# Altium PCB PCB1.PcbDoc (part 2 of 7)
Units mil, origin at the board's own origin, x right, y up, seen from the top; angles counter-clockwise.
Board outline 7650 x 4400 mil, 2 copper layers (Top Layer, Bottom Layer); 123 components, 190 nets, 788 pads, 165 vias.
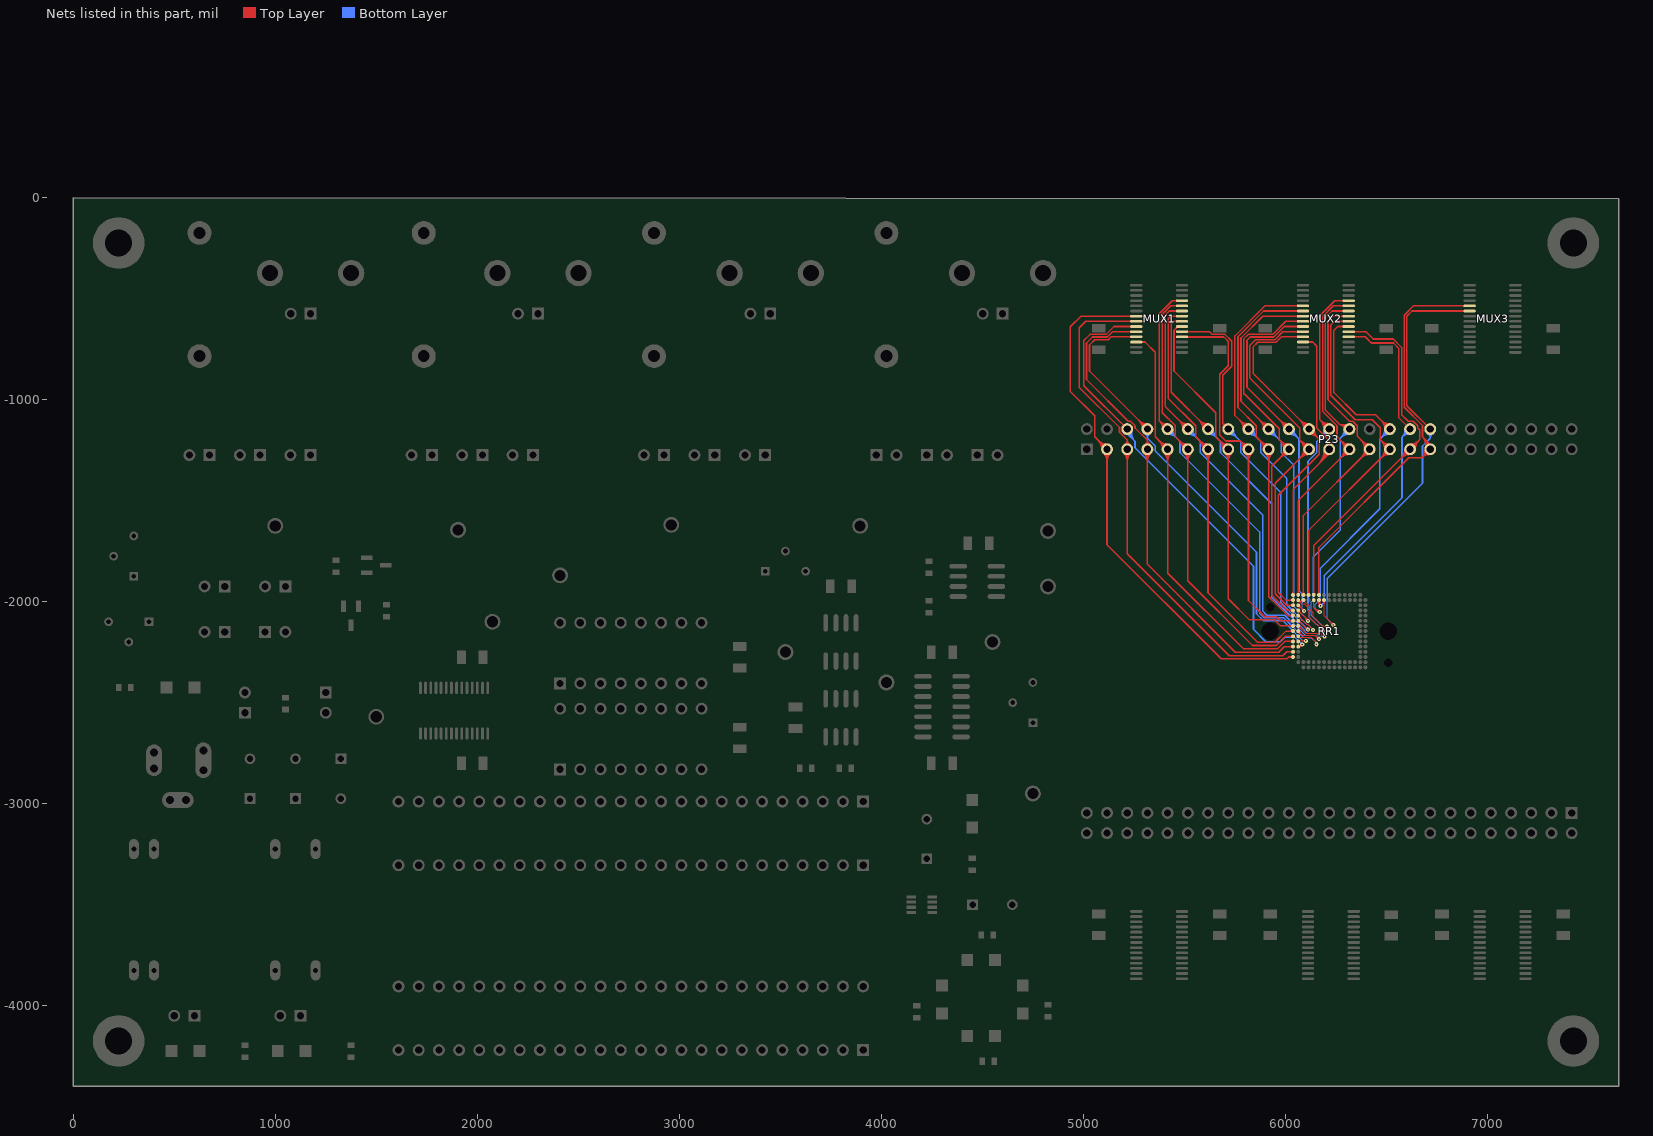
[diagram p2: the nets of this part, all layers, seen from the top]

## Via types
v1: diameter 30, hole 10, Top Layer to Bottom Layer, 118 vias
v2: diameter 20, hole 6, Top Layer to Bottom Layer, 47 vias

## Nets (pads, with @x,y where several pads share a name; then routed paths per layer and width w, separated by ;. In a path a pad name is that pad's centre, name@x,y a point inside that pad or via, vN(x,y) a via of type N, cw(c..) or ccw(c..) an arc to the next point about the centre after c; other vN are vias at no path point) (continued)
CELL2: MUX1.21 P23.3 RR1.3 | length 3032.1
  Top Layer w8: P23.3@5091.47,-1246 ccw(c5029.84,-1246) 5073.42,-1202.42 ccw(c5117,-1158.84) P23.3@5117,-1220.47 ; P23.3@5098.95,-1264.05 cw(c5055.37,-1307.63) 5117,-1307.63 cw(c5178.63,-1307.63) P23.3@5135.05,-1264.05 ; P23.3@5099.47,-1246 ccw(c5057.16,-1246) 5087.08,-1216.08 ccw(c5117,-1186.16) P23.3@5117,-1228.47 ; P23.3@5104.61,-1258.39 cw(c5074.68,-1288.32) 5117,-1288.32 cw(c5159.32,-1288.32) P23.3@5129.39,-1258.39 ; MUX1.21@5261.81,-587.2 4987.8,-587.2 4935,-640 4935,-960 5055.53,-1080.53 5055.53,-1184.53 P23.3@5117,-1246 5117,-1718.54 5682,-2283.54 6007,-2283.54 6016.59,-2273.95 RR1.3@6037.87,-2273.95 ; RR1.3@6033.73,-2278.08 ccw(c6023.76,-2288.06) 6023.76,-2273.95 ccw(c6023.76,-2259.85) RR1.3@6033.73,-2269.82 ; 5231.21,-587.2 ccw(c5231.21,-580.23) 5236.15,-585.16 cw(c5231.21,-580.23) 5231.21,-587.2 ; 5231.21,-587.2 cw(c5231.21,-594.18) 5236.15,-589.25 ccw(c5231.21,-594.18) 5231.21,-587.2
CELL3: MUX1.22 P23.5 RR1.5 | length 2874.2
  Top Layer w8: P23.5@5198.95,-1264.05 cw(c5155.37,-1307.63) 5217,-1307.63 cw(c5278.63,-1307.63) P23.5@5235.05,-1264.05 ; P23.5@5203.69,-1224.22 ccw(c5189.19,-1200.49) 5217,-1200.49 ; P23.5@5204.61,-1258.39 cw(c5174.68,-1288.32) 5217,-1288.32 cw(c5259.32,-1288.32) P23.5@5229.39,-1258.39 ; P23.5@5207.86,-1231.04 ccw(c5197.91,-1214.75) 5217,-1214.75 ccw(c5236.09,-1214.75) P23.5@5226.14,-1231.04 ; P23.5@5230.31,-1224.22 cw(c5244.81,-1200.49) 5217,-1200.49 ; MUX1.22@5261.81,-612.8 5012.2,-612.8 4980,-645 4980,-940 5178.47,-1138.47 5178.47,-1161.96 5217,-1200.49 ; RR1.5@6037.87,-2248.36 6006.18,-2248.36 5987,-2267.54 5722,-2267.54 5217,-1762.54 P23.5@5217,-1246 5217,-1200.49 ; 5231.21,-612.8 ccw(c5231.21,-605.82) 5236.15,-610.75 cw(c5231.21,-605.82) 5231.21,-612.8 ; 5231.21,-612.8 cw(c5231.21,-619.77) 5236.15,-614.84 ccw(c5231.21,-619.77) 5231.21,-612.8 ; 6023.76,-2248.36 ccw(c6023.76,-2234.26) 6033.73,-2244.23 cw(c6023.76,-2234.26) 6023.76,-2248.36 ; 6023.76,-2248.36 cw(c6023.76,-2262.47) 6033.73,-2252.49 ccw(c6023.76,-2262.47) 6023.76,-2248.36
CELL4: MUX1.23 P23.6 RR1.6 | length 2849.9
  Top Layer w5: RR1.6@6063.46,-2222.77 RR1.6@6073,-2222.77 ; RR1.6@6068.31,-2217.26 ccw(c6075.05,-2209.62) 6077.69,-2219.46 ccw(c6080.7,-2230.7) RR1.6@6070.13,-2225.84 ; RR1.6@6070.83,-2223.42 ccw(c6065.66,-2214.46) v2@6075.94,-2213.26 ; 6076.19,-2220.32 cw(c6079.65,-2226.32) v2@6081.45,-2219.63 ; RR1.6@6071.32,-2221.63 ccw(c6066.71,-2213.64) v2@6075.91,-2212.95 ; RR1.6@6071.32,-2221.63 ccw(c6066.71,-2213.64) v2@6075.91,-2212.95 ; RR1.6@6071.32,-2221.63 ccw(c6066.71,-2213.64) v2@6075.91,-2212.95 ; RR1.6@6072.81,-2220.77 cw(c6078.5,-2230.63) v2@6081.45,-2219.63 ; RR1.6@6072.81,-2220.77 cw(c6078.5,-2230.63) v2@6081.45,-2219.63 ; RR1.6@6072.81,-2220.77 cw(c6078.5,-2230.63) v2@6081.45,-2219.63 ; RR1.6@6073,-2222.77 ccw(c6065.49,-2215.26) 6075.98,-2213.57 cw(c6065.49,-2215.26) RR1.6@6073,-2222.77 ; RR1.6@6073,-2222.77 cw(c6080.52,-2230.28) 6082.2,-2219.79 ccw(c6080.52,-2230.28) RR1.6@6073,-2222.77 ; RR1.6@6073,-2222.77 v2(6083.39,-2212.39) ; v2(6083.39,-2212.39) cw(c6072.07,-2201.07) 6066.17,-2215.95 ccw(c6072.07,-2201.07) v2(6083.39,-2212.39) ; RR1.6@6064.32,-2220.59 ccw(c6069.01,-2208.77) 6078.01,-2217.77 cw(c6069.01,-2208.77) RR1.6@6064.32,-2220.59
  Top Layer w8: P23.6@5217,-1146 5002.5,-931.5 5002.5,-707.5 5032.5,-677.5 5112.19,-677.5 5151.31,-638.39 MUX1.23@5261.81,-638.39 ; 5231.21,-638.39 ccw(c5231.21,-631.41) 5236.15,-636.34 cw(c5231.21,-631.41) 5231.21,-638.39 ; 5231.21,-638.39 cw(c5231.21,-645.36) 5236.15,-640.43 ccw(c5231.21,-645.36) 5231.21,-638.39
  Bottom Layer w5: 6037,-2176 6047,-2176 v2(6083.39,-2212.39) ; 6070.58,-2199.58 ccw(c6083.39,-2186.78) 6083.39,-2204.89 cw(c6083.39,-2186.78) 6070.58,-2199.58 ; 6070.58,-2199.58 cw(c6057.78,-2212.39) 6075.89,-2212.39 ccw(c6057.78,-2212.39) 6070.58,-2199.58
  Bottom Layer w8: P23.6@5217,-1146 5217,-1168.94 5255.53,-1207.47 ; P23.6@5218.47,-1146.42 ccw(c5249.98,-1155.53) 5226.79,-1178.73 ; P23.6@5226.15,-1148.65 ccw(c5264.85,-1159.83) 5236.37,-1188.31 ; P23.6@5233.84,-1150.87 ccw(c5279.71,-1164.13) 5245.95,-1197.89 ; P23.6@5241.52,-1153.09 ccw(c5294.57,-1168.42) 5255.53,-1207.47 ; 6037,-2176 5997,-2176 5974.69,-2198.31 5903.01,-2198.31 5842,-2137.3 5842,-1825.49 5255.53,-1239.01 5255.53,-1207.47
CELL5: MUX1.24 P23.7 RR1.7 | length 2726.5
  Top Layer w8: MUX1.24@5261.81,-663.98 5144.1,-663.98 5117.58,-690.5 5044.99,-690.5 5015.5,-720 5015.5,-900.5 5222.47,-1107.47 5232.96,-1107.47 5255.53,-1130.04 5255.53,-1140.53 5317,-1202 ; P23.7@5298.95,-1264.05 cw(c5255.37,-1307.63) 5317,-1307.63 cw(c5378.63,-1307.63) P23.7@5335.05,-1264.05 ; P23.7@5304.33,-1223.84 ccw(c5291.85,-1202) 5317,-1202 ; P23.7@5304.61,-1258.39 cw(c5274.68,-1288.32) 5317,-1288.32 cw(c5359.32,-1288.32) P23.7@5329.39,-1258.39 ; P23.7@5308.3,-1230.78 ccw(c5299.73,-1215.79) 5317,-1215.79 ccw(c5334.27,-1215.79) P23.7@5325.7,-1230.78 ; P23.7@5329.67,-1223.84 cw(c5342.15,-1202) 5317,-1202 ; RR1.7@6037.87,-2222.77 5994,-2222.77 5966.81,-2249.97 5752,-2249.97 5317,-1814.97 P23.7@5317,-1246 5317,-1202 ; 5231.21,-663.98 ccw(c5231.21,-657) 5236.15,-661.93 cw(c5231.21,-657) 5231.21,-663.98 ; 5231.21,-663.98 cw(c5231.21,-670.95) 5236.15,-666.02 ccw(c5231.21,-670.95) 5231.21,-663.98 ; 6023.76,-2222.77 ccw(c6023.76,-2208.67) 6033.73,-2218.64 cw(c6023.76,-2208.67) 6023.76,-2222.77 ; 6023.76,-2222.77 cw(c6023.76,-2236.88) 6033.73,-2226.9 ccw(c6023.76,-2236.88) 6023.76,-2222.77
CELL6: MUX1.25 P23.8 RR1.8 | length 2660.3
  Top Layer w5: RR1.8@6063.46,-2197.18 6066.64,-2194 v2(6101,-2194) ; 6082.89,-2194 ccw(c6082.89,-2175.89) 6095.7,-2188.7 cw(c6082.89,-2175.89) 6082.89,-2194 ; 6082.89,-2194 cw(c6082.89,-2212.11) 6095.7,-2199.3 ccw(c6082.89,-2212.11) 6082.89,-2194
  Top Layer w8: MUX1.25@5261.81,-689.57 5136.9,-689.57 5122.96,-703.5 5056.5,-703.5 5030,-730 5030,-859 P23.8@5317,-1146 P23.8@5335,-1128 ; P23.8@5291.47,-1146 ccw(c5229.84,-1146) 5273.42,-1102.42 ccw(c5317,-1058.84) P23.8@5317,-1120.47 ; P23.8@5299.47,-1146 ccw(c5257.16,-1146) 5287.08,-1116.08 ccw(c5317,-1086.16) P23.8@5317,-1128.47 ; 5231.21,-689.57 ccw(c5231.21,-682.59) 5236.15,-687.52 cw(c5231.21,-682.59) 5231.21,-689.57 ; 5231.21,-689.57 cw(c5231.21,-696.54) 5236.15,-691.61 ccw(c5231.21,-696.54) 5231.21,-689.57
  Bottom Layer w5: 6047,-2154.03 6086.97,-2194 ; v2(6101,-2194) 6086.97,-2194 ; 6086.97,-2194 ccw(c6086.97,-2184.62) 6094.76,-2189.83 cw(c6086.97,-2184.62) 6086.97,-2194 ; 6086.97,-2194 cw(c6086.97,-2203.38) 6094.76,-2198.17 ccw(c6086.97,-2203.38) 6086.97,-2194
  Bottom Layer w8: P23.8@5303.69,-1167.78 cw(c5289.19,-1191.51) 5317,-1191.51 ; P23.8@5307.86,-1160.96 cw(c5297.91,-1177.25) 5317,-1177.25 cw(c5336.09,-1177.25) P23.8@5326.14,-1160.96 ; P23.8@5317,-1146 5317,-1191.51 ; P23.8@5330.31,-1167.78 ccw(c5344.81,-1191.51) 5317,-1191.51 ; 6047,-2154.03 5986.66,-2093.69 5889.69,-2093.69 5857,-2061 5857,-1756 5355.53,-1254.53 5355.53,-1230.04 5317,-1191.51
CELL7: MUX1.26 P23.9 RR1.9 | length 2417.7
  Top Layer w8: MUX1.26@5261.81,-715.16 5305.16,-715.16 5355.53,-765.53 5355.53,-1184.53 P23.9@5417,-1246 5417,-1858.97 5792,-2233.97 5807,-2233.97 5807.66,-2233.31 5960.84,-2233.31 5996.97,-2197.18 RR1.9@6037.87,-2197.18 ; P23.9@5391.47,-1246 ccw(c5329.84,-1246) 5373.42,-1202.42 ccw(c5417,-1158.84) P23.9@5417,-1220.47 ; P23.9@5398.95,-1264.05 cw(c5355.37,-1307.63) 5417,-1307.63 cw(c5478.63,-1307.63) P23.9@5435.05,-1264.05 ; P23.9@5399.47,-1246 ccw(c5357.16,-1246) 5387.08,-1216.08 ccw(c5417,-1186.16) P23.9@5417,-1228.47 ; P23.9@5404.61,-1258.39 cw(c5374.68,-1288.32) 5417,-1288.32 cw(c5459.32,-1288.32) P23.9@5429.39,-1258.39 ; 5292.41,-715.16 ccw(c5292.41,-722.13) 5287.48,-717.2 cw(c5292.41,-722.13) 5292.41,-715.16 ; 5292.41,-715.16 cw(c5292.41,-708.18) 5287.48,-713.11 ccw(c5292.41,-708.18) 5292.41,-715.16 ; 6023.76,-2197.18 ccw(c6023.76,-2183.08) 6033.73,-2193.05 cw(c6023.76,-2183.08) 6023.76,-2197.18 ; 6023.76,-2197.18 cw(c6023.76,-2211.29) 6033.73,-2201.31 ccw(c6023.76,-2211.29) 6023.76,-2197.18
CELL8: MUX1.11 P23.10 RR1.10 | length 2628.5
  Top Layer w5: RR1.10@6063.46,-2171.59 6068.37,-2176.5 6108.25,-2176.5 6109.25,-2177.5 6128.25,-2177.5 6153,-2202.25 v2(6153,-2211)
  Top Layer w8: P23.10@5391.48,-1145.32 ccw(c5335.17,-1143.83) 5375,-1104 ; P23.10@5399.48,-1145.54 ccw(c5360.81,-1144.51) 5388.16,-1117.16 ccw(c5415.51,-1089.81) P23.10@5416.54,-1128.48 ; P23.10@5416.32,-1120.48 cw(c5414.83,-1064.17) 5375,-1104 ; P23.10@5417,-1146 5375,-1104 ; MUX1.11@5488.19,-510.43 5439.57,-510.43 5375,-575 5375,-1104 ; 5457.59,-510.43 ccw(c5457.59,-503.46) 5462.52,-508.39 cw(c5457.59,-503.46) 5457.59,-510.43 ; 5457.59,-510.43 cw(c5457.59,-517.41) 5462.52,-512.48 ccw(c5457.59,-517.41) 5457.59,-510.43
  Bottom Layer w5: 6026.41,-2115.06 6087.85,-2176.5 6108.25,-2176.5 6109.75,-2178 6128.75,-2178 6153,-2202.25 v2(6153,-2211)
  Bottom Layer w8: P23.10@5417,-1171.53 cw(c5417,-1233.16) 5460.58,-1189.58 cw(c5504.16,-1146) P23.10@5442.53,-1146 ; P23.10@5417,-1163.53 cw(c5417,-1205.84) 5446.92,-1175.92 cw(c5476.84,-1146) P23.10@5434.53,-1146 ; P23.10@5417,-1146 5478.47,-1207.47 5478.47,-1261.96 5872,-1655.49 5872,-2057.62 5895.08,-2080.69 5992.04,-2080.69 6026.41,-2115.06
CELL9: MUX1.10 P23.11 RR1.11 | length 2552.4
  Top Layer w8: MUX1.10@5488.19,-536.02 5432.36,-536.02 5390,-578.38 5390,-1064.51 5455.53,-1130.04 5455.53,-1184.53 P23.11@5517,-1246 5517,-1897.31 5837,-2217.31 5954.21,-2217.31 5999.93,-2171.59 RR1.11@6037.87,-2171.59 ; P23.11@5491.47,-1246 ccw(c5429.84,-1246) 5473.42,-1202.42 ccw(c5517,-1158.84) P23.11@5517,-1220.47 ; P23.11@5498.95,-1264.05 cw(c5455.37,-1307.63) 5517,-1307.63 cw(c5578.63,-1307.63) P23.11@5535.05,-1264.05 ; P23.11@5499.47,-1246 ccw(c5457.16,-1246) 5487.08,-1216.08 ccw(c5517,-1186.16) P23.11@5517,-1228.47 ; P23.11@5504.61,-1258.39 cw(c5474.68,-1288.32) 5517,-1288.32 cw(c5559.32,-1288.32) P23.11@5529.39,-1258.39 ; 5457.59,-536.02 ccw(c5457.59,-529.05) 5462.52,-533.98 cw(c5457.59,-529.05) 5457.59,-536.02 ; 5457.59,-536.02 cw(c5457.59,-543) 5462.52,-538.07 ccw(c5457.59,-543) 5457.59,-536.02 ; 6023.76,-2171.59 ccw(c6023.76,-2157.49) 6033.73,-2167.46 cw(c6023.76,-2157.49) 6023.76,-2171.59 ; 6023.76,-2171.59 cw(c6023.76,-2185.7) 6033.73,-2175.72 ccw(c6023.76,-2185.7) 6023.76,-2171.59
CELL10: MUX1.9 P23.12 RR1.12 | length 2720.1
  Top Layer w5: RR1.12@6060.85,-2146.53 ccw(c6071.32,-2144.39) 6068.55,-2154.71 ; RR1.12@6063.46,-2146 6083.96,-2166.5 6112.39,-2166.5 6113.39,-2167.5 6147.5,-2167.5 v2(6166,-2186) ; RR1.12@6063.99,-2143.4 cw(c6061.85,-2153.86) 6072.16,-2151.1 ; 6157.02,-2180.46 ccw(c6167.72,-2177.59) v2@6165.5,-2188.45 ; 6160.46,-2177.02 cw(c6157.59,-2187.72) v2@6168.45,-2185.5 ; 6075.99,-2158.53 ccw(c6063.46,-2171.07) 6063.46,-2153.34 cw(c6063.46,-2171.07) 6075.99,-2158.53 ; 6075.99,-2158.53 cw(c6088.53,-2146) 6070.8,-2146 ccw(c6088.53,-2146) 6075.99,-2158.53 ; 6153.2,-2173.2 ccw(c6166,-2160.39) 6166,-2178.5 cw(c6166,-2160.39) 6153.2,-2173.2 ; 6153.2,-2173.2 cw(c6140.39,-2186) 6158.5,-2186 ccw(c6140.39,-2186) 6153.2,-2173.2
  Top Layer w8: MUX1.9@5488.19,-561.61 5425.16,-561.61 5405,-581.77 5405,-1034 P23.12@5517,-1146 ; P23.12@5491.47,-1146 ccw(c5429.84,-1146) 5473.42,-1102.42 ccw(c5517,-1058.84) P23.12@5517,-1120.47 ; P23.12@5499.47,-1146 ccw(c5457.16,-1146) 5487.08,-1116.08 ccw(c5517,-1086.16) P23.12@5517,-1128.47 ; 5457.59,-561.61 ccw(c5457.59,-554.64) 5462.52,-559.57 cw(c5457.59,-554.64) 5457.59,-561.61 ; 5457.59,-561.61 cw(c5457.59,-568.59) 5462.52,-563.66 ccw(c5457.59,-568.59) 5457.59,-561.61
  Bottom Layer w5: 6032.86,-2101 6098.36,-2166.5 6112.39,-2166.5 6113.39,-2167.5 6147.5,-2167.5 v2(6166,-2186)
  Bottom Layer w8: P23.12@5517,-1171.53 cw(c5517,-1233.16) 5560.58,-1189.58 cw(c5604.16,-1146) P23.12@5542.53,-1146 ; P23.12@5517,-1163.53 cw(c5517,-1205.84) 5546.92,-1175.92 cw(c5576.84,-1146) P23.12@5534.53,-1146 ; P23.12@5517,-1146 5578.47,-1207.47 5578.47,-1261.96 5887.51,-1571 5887.51,-2046.51 5908.26,-2067.26 5997,-2067.26 6031.8,-2102.06
CELL11: MUX1.8 P23.13 RR1.13 | length 2449.4
  Top Layer w8: MUX1.8@5488.19,-587.2 5432.8,-587.2 5420,-600 5420,-994.51 5555.53,-1130.04 5555.53,-1184.53 P23.13@5617,-1246 5617,-1956.31 5862,-2201.31 5947.59,-2201.31 6002.89,-2146 RR1.13@6037.87,-2146 ; P23.13@5591.47,-1246 ccw(c5529.84,-1246) 5573.42,-1202.42 ccw(c5617,-1158.84) P23.13@5617,-1220.47 ; P23.13@5598.95,-1264.05 cw(c5555.37,-1307.63) 5617,-1307.63 cw(c5678.63,-1307.63) P23.13@5635.05,-1264.05 ; P23.13@5599.47,-1246 ccw(c5557.16,-1246) 5587.08,-1216.08 ccw(c5617,-1186.16) P23.13@5617,-1228.47 ; P23.13@5604.61,-1258.39 cw(c5574.68,-1288.32) 5617,-1288.32 cw(c5659.32,-1288.32) P23.13@5629.39,-1258.39 ; 5457.59,-587.2 ccw(c5457.59,-580.23) 5462.52,-585.16 cw(c5457.59,-580.23) 5457.59,-587.2 ; 5457.59,-587.2 cw(c5457.59,-594.18) 5462.52,-589.25 ccw(c5457.59,-594.18) 5457.59,-587.2 ; 6023.76,-2146 ccw(c6023.76,-2131.9) 6033.73,-2141.87 cw(c6023.76,-2131.9) 6023.76,-2146 ; 6023.76,-2146 cw(c6023.76,-2160.1) 6033.73,-2150.13 ccw(c6023.76,-2160.1) 6023.76,-2146
CELL12: MUX1.7 P23.14 RR1.14 | length 2542.6
  Top Layer w5: RR1.14@6060.85,-2120.94 ccw(c6071.32,-2118.8) 6068.55,-2129.12 ; RR1.14@6063.46,-2120.41 6099.55,-2156.5 6116.53,-2156.5 6117.53,-2157.5 6173.75,-2157.5 6189.25,-2173 v2(6193,-2173) ; RR1.14@6063.99,-2117.81 cw(c6061.85,-2128.27) 6072.16,-2125.51 ; 6075.99,-2132.94 ccw(c6063.46,-2145.48) 6063.46,-2127.75 cw(c6063.46,-2145.48) 6075.99,-2132.94 ; 6075.99,-2132.94 cw(c6088.53,-2120.41) 6070.8,-2120.41 ccw(c6088.53,-2120.41) 6075.99,-2132.94
  Top Layer w8: MUX1.7@5488.19,-612.8 5445.2,-612.8 5435,-623 5435,-964 P23.14@5617,-1146 ; P23.14@5591.47,-1146 ccw(c5529.84,-1146) 5573.42,-1102.42 ccw(c5617,-1058.84) P23.14@5617,-1120.47 ; P23.14@5599.47,-1146 ccw(c5557.16,-1146) 5587.08,-1116.08 ccw(c5617,-1086.16) P23.14@5617,-1128.47 ; 5457.59,-612.8 ccw(c5457.59,-605.82) 5462.52,-610.75 cw(c5457.59,-605.82) 5457.59,-612.8 ; 5457.59,-612.8 cw(c5457.59,-619.77) 5462.52,-614.84 ccw(c5457.59,-619.77) 5457.59,-612.8
  Bottom Layer w5: 6038.06,-2085.45 6094.5,-2141.88 6094.5,-2146.25 6104.75,-2156.5 6116.53,-2156.5 6117.53,-2157.5 6151.64,-2157.5 6162.64,-2168.5 6188.5,-2168.5 v2(6193,-2173)
  Bottom Layer w8: P23.14@5617,-1171.53 cw(c5617,-1233.16) 5660.58,-1189.58 cw(c5704.16,-1146) P23.14@5642.53,-1146 ; P23.14@5617,-1163.53 cw(c5617,-1205.84) 5646.92,-1175.92 cw(c5676.84,-1146) P23.14@5634.53,-1146 ; P23.14@5617,-1146 5678.47,-1207.47 5678.47,-1261.96 5932,-1515.49 5932,-1979.38 6038.06,-2085.45
CELL13: MUX1.6 P23.15 RR1.15 | length 2257.1
  Top Layer w8: MUX1.6@5488.19,-638.39 5467.69,-638.39 5448.68,-657.39 5448.68,-858.68 5655,-1065 5655,-1128.99 5655.53,-1129.51 5655.53,-1184.53 P23.15@5717,-1246 5717,-1985.69 5822,-2090.69 5947.59,-2090.69 5977.3,-2120.41 RR1.15@6037.87,-2120.41 ; P23.15@5691.47,-1246 ccw(c5629.84,-1246) 5673.42,-1202.42 ccw(c5717,-1158.84) P23.15@5717,-1220.47 ; P23.15@5698.95,-1264.05 cw(c5655.37,-1307.63) 5717,-1307.63 cw(c5778.63,-1307.63) P23.15@5735.05,-1264.05 ; P23.15@5699.47,-1246 ccw(c5657.16,-1246) 5687.08,-1216.08 ccw(c5717,-1186.16) P23.15@5717,-1228.47 ; P23.15@5704.61,-1258.39 cw(c5674.68,-1288.32) 5717,-1288.32 cw(c5759.32,-1288.32) P23.15@5729.39,-1258.39 ; 6023.76,-2120.41 ccw(c6023.76,-2106.3) 6033.73,-2116.28 cw(c6023.76,-2106.3) 6023.76,-2120.41 ; 6023.76,-2120.41 cw(c6023.76,-2134.51) 6033.73,-2124.54 ccw(c6023.76,-2134.51) 6023.76,-2120.41 ; 5457.43,-648.64 ccw(c5447.17,-638.39) 5461.68,-638.39 cw(c5447.17,-638.39) 5457.43,-648.64
CELL14: MUX1.5 P23.16 RR1.16 | length 2410.2
  Top Layer w5: RR1.16@6060.85,-2095.35 ccw(c6071.32,-2093.21) 6068.55,-2103.53 ; RR1.16@6063.46,-2094.82 6107.64,-2139 v2(6112,-2139) ; RR1.16@6063.99,-2092.22 cw(c6061.85,-2102.68) 6072.16,-2099.92 ; 6104.76,-2129.56 cw(c6101.08,-2143.32) v2@6114.32,-2138.08 ; 6075.99,-2107.35 ccw(c6063.46,-2119.89) 6063.46,-2102.16 cw(c6063.46,-2119.89) 6075.99,-2107.35 ; 6075.99,-2107.35 cw(c6088.53,-2094.82) 6070.8,-2094.82 ccw(c6088.53,-2094.82) 6075.99,-2107.35 ; 6091.75,-2123.11 ccw(c6112,-2102.86) 6112,-2131.5 cw(c6112,-2102.86) 6091.75,-2123.11 ; 6100.29,-2131.65 ccw(c6112,-2119.93) 6112,-2136.5 cw(c6112,-2119.93) 6100.29,-2131.65 ; 6102.28,-2133.64 cw(c6096.92,-2139) 6104.5,-2139 ccw(c6096.92,-2139) 6102.28,-2133.64
  Top Layer w8: MUX1.5@5488.19,-663.98 5624.28,-663.98 5637.81,-677.5 5700.89,-677.5 5735,-711.62 5735,-835 5690,-880 5690,-1119 ; P23.16@5693.42,-1136.22 ccw(c5678.83,-1130.17) 5690,-1119 ; P23.16@5707.22,-1122.42 cw(c5701.17,-1107.83) 5690,-1119 ; P23.16@5717,-1146 5690,-1119 ; 5518.79,-663.98 ccw(c5518.79,-670.95) 5513.85,-666.02 cw(c5518.79,-670.95) 5518.79,-663.98 ; 5518.79,-663.98 cw(c5518.79,-657) 5513.85,-661.93 ccw(c5518.79,-657) 5518.79,-663.98
  Bottom Layer w5: 6042,-2071 6044,-2071 v2(6112,-2139) ; 6099.2,-2126.2 ccw(c6112,-2113.39) 6112,-2131.5 cw(c6112,-2113.39) 6099.2,-2126.2 ; 6099.2,-2126.2 cw(c6086.39,-2139) 6104.5,-2139 ccw(c6086.39,-2139) 6099.2,-2126.2
  Bottom Layer w8: P23.16@5717,-1171.53 cw(c5717,-1233.16) 5760.58,-1189.58 cw(c5804.16,-1146) P23.16@5742.53,-1146 ; P23.16@5717,-1163.53 cw(c5717,-1205.84) 5746.92,-1175.92 cw(c5776.84,-1146) P23.16@5734.53,-1146 ; P23.16@5717,-1146 5778.47,-1207.47 5778.47,-1261.96 5977,-1460.49 5977,-2006 6042,-2071
CELL15: MUX1.4 P23.17 RR1.17 | length 2273.4
  Top Layer w8: MUX1.4@5488.19,-689.57 5489.13,-690.5 5695.5,-690.5 5717.46,-712.46 5717.46,-832.54 5675,-875 5675,-1175 5705,-1205 5776,-1205 ; P23.17@5791.5,-1244.87 ccw(c5738.47,-1242.54) 5776,-1205 ; P23.17@5798.95,-1264.05 cw(c5755.37,-1307.63) 5817,-1307.63 cw(c5878.63,-1307.63) P23.17@5835.05,-1264.05 ; P23.17@5799.49,-1245.23 ccw(c5763.08,-1243.62) 5788.85,-1217.85 ccw(c5814.62,-1192.08) P23.17@5816.23,-1228.49 ; P23.17@5804.61,-1258.39 cw(c5774.68,-1288.32) 5817,-1288.32 cw(c5859.32,-1288.32) P23.17@5829.39,-1258.39 ; P23.17@5815.87,-1220.5 cw(c5813.54,-1167.47) 5776,-1205 ; RR1.17@6037.87,-2094.82 5974.34,-2094.82 5954.21,-2074.69 5897,-2074.69 5817,-1994.69 P23.17@5817,-1246 5776,-1205 ; 6023.76,-2094.82 ccw(c6023.76,-2080.71) 6033.73,-2090.69 cw(c6023.76,-2080.71) 6023.76,-2094.82 ; 6023.76,-2094.82 cw(c6023.76,-2108.92) 6033.73,-2098.95 ccw(c6023.76,-2108.92) 6023.76,-2094.82 ; MUX1.4@5513.85,-687.52 ccw(c5521.05,-680.33) 5521.05,-690.5 cw(c5521.05,-680.33) MUX1.4@5513.85,-687.52
CELL16: MUX2.19 P23.18 RR1.18 | length 2538.6
  Top Layer w5: RR1.18@6063.46,-2069.23 6063.46,-2070.29 6080.8,-2087.64 6080.8,-2088.94 6104.36,-2112.5 6110.25,-2112.5 6137,-2139.25 v2(6137,-2140) ; RR1.18@6064.12,-2066.65 cw(c6061.3,-2077.66) 6072.27,-2074.72 ; RR1.18@6063.46,-2076.57 cw(c6063.46,-2091.73) 6074.17,-2081.01 ccw(c6063.46,-2091.73) RR1.18@6063.46,-2076.57 ; RR1.18@6070.8,-2069.23 ccw(c6091.1,-2069.23) 6076.74,-2083.58 cw(c6091.1,-2069.23) RR1.18@6070.8,-2069.23
  Top Layer w8: P23.18@5791.47,-1146 ccw(c5729.84,-1146) 5773.42,-1102.42 ccw(c5817,-1058.84) P23.18@5817,-1120.47 ; P23.18@5799.47,-1146 ccw(c5757.16,-1146) 5787.08,-1116.08 ccw(c5817,-1086.16) P23.18@5817,-1128.47 ; P23.18@5817,-1146 5750,-1079 5750,-685 5898.98,-536.02 MUX2.19@6086.81,-536.02 ; 6056.21,-536.02 ccw(c6056.21,-529.05) 6061.15,-533.98 cw(c6056.21,-529.05) 6056.21,-536.02 ; 6056.21,-536.02 cw(c6056.21,-543) 6061.15,-538.07 ccw(c6056.21,-543) 6056.21,-536.02
  Bottom Layer w5: 6082,-2091 6083.25,-2091 6104.75,-2112.5 6110.25,-2112.5 6137,-2139.25 v2(6137,-2140)
  Bottom Layer w8: P23.18@5817,-1171.53 cw(c5817,-1233.16) 5860.58,-1189.58 cw(c5904.16,-1146) P23.18@5842.53,-1146 ; P23.18@5817,-1163.53 cw(c5817,-1205.84) 5846.92,-1175.92 cw(c5876.84,-1146) P23.18@5834.53,-1146 ; P23.18@5817,-1146 5878.47,-1207.47 5878.47,-1261.96 6007,-1390.49 6007,-2016 6082,-2091
CELL17: MUX2.20 P23.19 RR1.19 | length 2255
  Top Layer w8: P23.19@5891.47,-1246 ccw(c5829.84,-1246) 5873.42,-1202.42 ccw(c5917,-1158.84) P23.19@5917,-1220.47 ; P23.19@5898.95,-1264.05 cw(c5855.37,-1307.63) 5917,-1307.63 cw(c5978.63,-1307.63) P23.19@5935.05,-1264.05 ; P23.19@5899.47,-1246 ccw(c5857.16,-1246) 5887.08,-1216.08 ccw(c5917,-1186.16) P23.19@5917,-1228.47 ; P23.19@5904.61,-1258.39 cw(c5874.68,-1288.32) 5917,-1288.32 cw(c5959.32,-1288.32) P23.19@5929.39,-1258.39 ; RR1.19@6033.73,-2073.36 ccw(c6023.76,-2083.33) 6023.76,-2069.23 ccw(c6023.76,-2055.12) RR1.19@6033.73,-2065.1 ; RR1.19@6037.87,-2069.23 6011.94,-2069.23 5938.13,-1995.42 5936.42,-1995.42 5917,-1976 P23.19@5917,-1246 5855.53,-1184.53 5855.53,-1130.04 5765,-1039.51 5765,-688.38 5891.77,-561.61 MUX2.20@6086.81,-561.61 ; 6056.21,-561.61 ccw(c6056.21,-554.64) 6061.15,-559.57 cw(c6056.21,-554.64) 6056.21,-561.61 ; 6056.21,-561.61 cw(c6056.21,-568.59) 6061.15,-563.66 ccw(c6056.21,-568.59) 6056.21,-561.61
CELL18: MUX2.21 P23.20 RR1.20 | length 2547.9
  Top Layer w5: RR1.20@6063.46,-2043.64 6063.46,-2044.7 6112,-2093.25 v2(6112,-2095) ; RR1.20@6064.12,-2041.06 cw(c6061.3,-2052.07) 6072.27,-2049.13 ; 6102.83,-2088.78 ccw(c6114.69,-2085.6) v2@6111.31,-2097.4 ; 6107.14,-2086.2 cw(c6104.55,-2095.85) v2@6114.48,-2094.72 ; RR1.20@6063.46,-2050.98 cw(c6063.46,-2066.14) 6074.17,-2055.42 ccw(c6063.46,-2066.14) RR1.20@6063.46,-2050.98 ; RR1.20@6070.8,-2043.64 ccw(c6091.1,-2043.64) 6076.74,-2057.99 cw(c6091.1,-2043.64) RR1.20@6070.8,-2043.64 ; 6097.96,-2079.2 cw(c6082.16,-2095) 6104.5,-2095 ccw(c6082.16,-2095) 6097.96,-2079.2 ; 6102.19,-2083.44 ccw(c6112,-2073.63) 6112,-2087.5 cw(c6112,-2073.63) 6102.19,-2083.44
  Top Layer w8: P23.20@5891.47,-1146 ccw(c5829.84,-1146) 5873.42,-1102.42 ccw(c5917,-1058.84) P23.20@5917,-1120.47 ; P23.20@5899.47,-1146 ccw(c5857.16,-1146) 5887.08,-1116.08 ccw(c5917,-1086.16) P23.20@5917,-1128.47 ; P23.20@5917,-1146 5780,-1009 5780,-695 5887.8,-587.2 MUX2.21@6086.81,-587.2 ; 6056.21,-587.2 ccw(c6056.21,-580.23) 6061.15,-585.16 cw(c6056.21,-580.23) 6056.21,-587.2 ; 6056.21,-587.2 cw(c6056.21,-594.18) 6061.15,-589.25 ccw(c6056.21,-594.18) 6056.21,-587.2
  Bottom Layer w5: 6042,-1981 6042,-2022.22 6112,-2092.22 v2(6112,-2095) ; 6102.73,-2088.38 ccw(c6115.31,-2085.01) v2@6111.21,-2097.37 ; 6097.23,-2077.44 cw(c6079.67,-2095) 6104.5,-2095 ccw(c6079.67,-2095) 6097.23,-2077.44 ; 6103.95,-2084.17 ccw(c6112,-2076.11) 6112,-2087.5 cw(c6112,-2076.11) 6103.95,-2084.17 ; 6105.76,-2085.98 cw(c6096.74,-2095) 6109.5,-2095 ccw(c6096.74,-2095) 6105.76,-2085.98
  Bottom Layer w8: P23.20@5917,-1171.53 cw(c5917,-1233.16) 5960.58,-1189.58 cw(c6004.16,-1146) P23.20@5942.53,-1146 ; P23.20@5917,-1163.53 cw(c5917,-1205.84) 5946.92,-1175.92 cw(c5976.84,-1146) P23.20@5934.53,-1146 ; P23.20@5917,-1146 5978.47,-1207.47 5978.47,-1261.96 6042,-1325.49 6042,-1981
CELL19: MUX2.22 P23.21 RR1.21 | length 2257.3
  Top Layer w8: P23.21@6017,-1271.53 ccw(c6017,-1333.16) 5973.42,-1289.58 ccw(c5929.84,-1246) 5991.47,-1246 ccw(c5929.84,-1246) 5973.42,-1202.42 ccw(c6017,-1158.84) P23.21@6017,-1220.47 ; P23.21@6017,-1263.53 ccw(c6017,-1305.84) 5987.08,-1275.92 ccw(c5957.16,-1246) 5999.47,-1246 ccw(c5957.16,-1246) 5987.08,-1216.08 ccw(c6017,-1186.16) P23.21@6017,-1228.47 ; RR1.21@6037.87,-2043.64 6008.98,-2043.64 5933,-1967.66 5933,-1330 P23.21@6017,-1246 5970,-1199 5970,-1144.51 5798.49,-973 5793,-973 5793,-700.38 5815.88,-677.5 5937.19,-677.5 6001.9,-612.8 MUX2.22@6086.81,-612.8 ; 6023.76,-2043.64 ccw(c6023.76,-2029.53) 6033.73,-2039.51 cw(c6023.76,-2029.53) 6023.76,-2043.64 ; 6023.76,-2043.64 cw(c6023.76,-2057.74) 6033.73,-2047.77 ccw(c6023.76,-2057.74) 6023.76,-2043.64 ; 6056.21,-612.8 ccw(c6056.21,-605.82) 6061.15,-610.75 cw(c6056.21,-605.82) 6056.21,-612.8 ; 6056.21,-612.8 cw(c6056.21,-619.77) 6061.15,-614.84 ccw(c6056.21,-619.77) 6056.21,-612.8
CELL20: MUX2.23 P23.22 RR1.22 | length 2313.8
  Top Layer w5: RR1.22@6060.87,-2018.65 ccw(c6071.63,-2016.14) 6068.77,-2026.81 ; RR1.22@6063.46,-2018.05 6064.05,-2018.05 v2(6093,-2047) ; RR1.22@6063.91,-2015.43 cw(c6062.14,-2025.6) 6072.11,-2022.92 ; 6084.02,-2041.46 ccw(c6094.72,-2038.59) v2@6092.5,-2049.45 ; 6087.46,-2038.02 cw(c6084.59,-2048.72) v2@6095.45,-2046.5 ; 6080.2,-2034.2 ccw(c6093,-2021.39) 6093,-2039.5 cw(c6093,-2021.39) 6080.2,-2034.2 ; 6080.2,-2034.2 cw(c6067.39,-2047) 6085.5,-2047 ccw(c6067.39,-2047) 6080.2,-2034.2 ; RR1.22@6063.46,-2025.39 cw(c6063.46,-2044.54) 6077,-2031 ccw(c6063.46,-2044.54) RR1.22@6063.46,-2025.39 ; RR1.22@6070.8,-2018.05 ccw(c6087.1,-2018.05) 6075.57,-2029.57 cw(c6087.1,-2018.05) RR1.22@6070.8,-2018.05
  Top Layer w8: P23.22@5991.47,-1146 ccw(c5929.84,-1146) 5973.42,-1102.42 ccw(c6017,-1058.84) P23.22@6017,-1120.47 ; P23.22@5999.47,-1146 ccw(c5957.16,-1146) 5987.08,-1116.08 ccw(c6017,-1086.16) P23.22@6017,-1128.47 ; P23.22@6017,-1146 5810,-939 5810,-706 5825.5,-690.5 5942.58,-690.5 5994.7,-638.39 MUX2.23@6086.81,-638.39 ; 6056.21,-638.39 ccw(c6056.21,-631.41) 6061.15,-636.34 cw(c6056.21,-631.41) 6056.21,-638.39 ; 6056.21,-638.39 cw(c6056.21,-645.36) 6061.15,-640.43 ccw(c6056.21,-645.36) 6056.21,-638.39
  Bottom Layer w5: 6083.5,-2006 6083.5,-2037.5 v2(6093,-2047)
  Bottom Layer w8: P23.22@6017,-1171.53 cw(c6017,-1233.16) 6060.58,-1189.58 cw(c6104.16,-1146) P23.22@6042.53,-1146 ; P23.22@6017,-1163.53 cw(c6017,-1205.84) 6046.92,-1175.92 cw(c6076.84,-1146) P23.22@6034.53,-1146 ; P23.22@6017,-1146 6067,-1196 6067,-1946 6083.5,-1962.5 6083.5,-2006
CELL21: MUX2.24 P23.23 RR1.23 | length 2217.6
  Top Layer w8: RR1.23@6037.87,-2018.05 6006.01,-2018.05 5949,-1961.03 5949,-1414 P23.23@6117,-1246 6070,-1199 6070,-1140 5823,-893 5823,-732 5851.5,-703.5 5947.96,-703.5 5987.49,-663.98 MUX2.24@6086.81,-663.98 ; P23.23@6117,-1271.53 ccw(c6117,-1333.16) 6073.42,-1289.58 ccw(c6029.84,-1246) 6091.47,-1246 ccw(c6029.84,-1246) 6073.42,-1202.42 ccw(c6117,-1158.84) P23.23@6117,-1220.47 ; P23.23@6117,-1263.53 ccw(c6117,-1305.84) 6087.08,-1275.92 ccw(c6057.16,-1246) 6099.47,-1246 ccw(c6057.16,-1246) 6087.08,-1216.08 ccw(c6117,-1186.16) P23.23@6117,-1228.47 ; 6023.76,-2018.05 ccw(c6023.76,-2003.94) 6033.73,-2013.92 cw(c6023.76,-2003.94) 6023.76,-2018.05 ; 6023.76,-2018.05 cw(c6023.76,-2032.15) 6033.73,-2022.18 ccw(c6023.76,-2032.15) 6023.76,-2018.05 ; 6056.21,-663.98 ccw(c6056.21,-657) 6061.15,-661.93 cw(c6056.21,-657) 6056.21,-663.98 ; 6056.21,-663.98 cw(c6056.21,-670.95) 6061.15,-666.02 ccw(c6056.21,-670.95) 6056.21,-663.98
CELL22: MUX2.25 P23.24 RR1.24 | length 2182.6
  Top Layer w8: RR1.24@6037.87,-1992.46 6003.05,-1992.46 5965,-1954.41 5965,-1473 6167,-1271 6167,-1196 P23.24@6117,-1146 5840,-869 5840,-740 5863.5,-716.5 5953.35,-716.5 5980.28,-689.57 MUX2.25@6086.81,-689.57 ; P23.24@6091.47,-1146 ccw(c6029.84,-1146) 6073.42,-1102.42 ccw(c6117,-1058.84) P23.24@6117,-1120.47 ; P23.24@6099.47,-1146 ccw(c6057.16,-1146) 6087.08,-1116.08 ccw(c6117,-1086.16) P23.24@6117,-1128.47 ; P23.24@6117,-1171.53 cw(c6117,-1233.16) 6160.58,-1189.58 cw(c6204.16,-1146) P23.24@6142.53,-1146 ; P23.24@6117,-1163.53 cw(c6117,-1205.84) 6146.92,-1175.92 cw(c6176.84,-1146) P23.24@6134.53,-1146 ; 6023.76,-1992.46 ccw(c6023.76,-1978.35) 6033.73,-1988.33 cw(c6023.76,-1978.35) 6023.76,-1992.46 ; 6023.76,-1992.46 cw(c6023.76,-2006.56) 6033.73,-1996.59 ccw(c6023.76,-2006.56) 6023.76,-1992.46 ; 6056.21,-689.57 ccw(c6056.21,-682.59) 6061.15,-687.52 cw(c6056.21,-682.59) 6056.21,-689.57 ; 6056.21,-689.57 cw(c6056.21,-696.54) 6061.15,-691.61 ccw(c6056.21,-696.54) 6056.21,-689.57
CELL23: MUX2.26 P23.25 RR1.25 | length 1811.1
  Top Layer w8: RR1.25@6033.73,-1962.73 ccw(c6023.76,-1952.76) 6037.87,-1952.76 ccw(c6051.97,-1952.76) RR1.25@6042,-1962.73 ; RR1.25@6037.87,-1966.87 6037.87,-1446 6217,-1266.87 P23.25@6217,-1246 6217,-1202 ; MUX2.26@6086.81,-715.16 6135.16,-715.16 6155.53,-735.53 6155.53,-1140.53 6217,-1202 ; 6158.67,-1325.2 ccw(c6079.47,-1246) P23.25@6191.47,-1246 ; 6172.32,-1311.54 ccw(c6106.78,-1246) P23.25@6199.47,-1246 ; 6185.98,-1297.89 ccw(c6134.1,-1246) P23.25@6207.47,-1246 ; 6199.64,-1284.23 ccw(c6161.41,-1246) P23.25@6215.47,-1246 ; P23.25@6204.33,-1223.84 ccw(c6191.85,-1202) 6217,-1202 ; P23.25@6208.3,-1230.78 ccw(c6199.73,-1215.79) 6217,-1215.79 ccw(c6234.27,-1215.79) P23.25@6225.7,-1230.78 ; 6209.04,-1274.82 cw(c6217,-1282.78) P23.25@6217,-1271.53 ; P23.25@6229.67,-1223.84 cw(c6242.15,-1202) 6217,-1202 ; 6117.41,-715.16 ccw(c6117.41,-722.13) 6112.48,-717.2 cw(c6117.41,-722.13) 6117.41,-715.16 ; 6117.41,-715.16 cw(c6117.41,-708.18) 6112.48,-713.11 ccw(c6117.41,-708.18) 6117.41,-715.16
CELL24: MUX2.11 P23.26 RR1.26 | length 3362.6
  Top Layer w5: RR1.26@6060.88,-1993.12 ccw(c6071.89,-1990.3) 6068.95,-2001.27 ; RR1.26@6063.46,-1992.46 6064.52,-1992.46 6081.86,-2009.8 6092.25,-2009.8 6110.23,-2027.78 6110.23,-2041.65 6118.77,-2050.19 6118.77,-2077.02 6187,-2145.25 v2(6187,-2146) ; 6177.94,-2140.17 ccw(c6189.12,-2137.17) v2@6186.42,-2148.43 ; 6181.75,-2137.09 cw(c6179,-2147.34) v2@6189.47,-2145.59 ; RR1.26@6063.46,-1999.8 cw(c6063.46,-2020.1) 6077.81,-2005.74 ccw(c6063.46,-2020.1) RR1.26@6063.46,-1999.8 ; RR1.26@6070.8,-1992.46 ccw(c6085.96,-1992.46) 6075.24,-2003.17 cw(c6085.96,-1992.46) RR1.26@6070.8,-1992.46 ; 6173.67,-2131.92 cw(c6159.59,-2146) 6179.5,-2146 ccw(c6159.59,-2146) 6173.67,-2131.92 ; 6175.47,-2133.73 ccw(c6187,-2122.2) 6187,-2138.5 cw(c6187,-2122.2) 6175.47,-2133.73
  Top Layer w8: 6182.21,-1111.45 ccw(c6226.51,-1099.58) P23.26@6217.31,-1144.5 ; 6182.45,-1111.21 cw(c6170.58,-1155.51) P23.26@6215.5,-1146.31 ; 6185.57,-1123.96 ccw(c6223.6,-1113.76) P23.26@6215.7,-1152.34 ; 6188.27,-1118 ccw(c6207.54,-1107.85) P23.26@6212.78,-1128.99 ; 6188.92,-1136.46 ccw(c6220.7,-1127.95) P23.26@6214.1,-1160.18 ; 6189,-1117.27 cw(c6178.85,-1136.54) P23.26@6199.99,-1141.78 ; 6191.25,-1123.66 cw(c6174.1,-1132.7) P23.26@6192.62,-1138.44 ; P23.26@6192.59,-1138.53 ccw(c6171.02,-1131.92) 6187.08,-1116.08 ; P23.26@6192.64,-1138.38 ccw(c6171.58,-1131.79) 6187.08,-1116.08 ; P23.26@6192.68,-1138.24 ccw(c6172.07,-1131.67) 6187.47,-1116.47 ; P23.26@6192.73,-1138.09 ccw(c6172.61,-1131.53) 6187.47,-1116.47 ; 6193.03,-1127.03 ccw(c6210.07,-1118.06) P23.26@6214.71,-1136.75 ; 6194.66,-1120.25 ccw(c6203.7,-1103.1) P23.26@6209.44,-1121.62 ; 6194.96,-1114.57 cw(c6184.76,-1152.6) P23.26@6223.34,-1144.7 ; 6198.03,-1122.03 cw(c6189.06,-1139.07) P23.26@6207.75,-1143.71 ; 6207.46,-1117.92 cw(c6198.95,-1149.7) P23.26@6231.18,-1143.1 ; P23.26@6209.09,-1121.73 cw(c6202.53,-1101.61) 6187.47,-1116.47 ; P23.26@6209.24,-1121.68 cw(c6202.67,-1101.07) 6187.47,-1116.47 ; P23.26@6209.38,-1121.64 cw(c6202.79,-1100.58) 6187.08,-1116.08 ; P23.26@6209.53,-1121.59 cw(c6202.92,-1100.02) 6187.08,-1116.08 ; P23.26@6217,-1146 6170,-1099 6170,-585 6244.57,-510.43 MUX2.11@6313.19,-510.43 ; 6173.42,-1102.42 ccw(c6217,-1058.84) 6217,-1120.47 cw(c6217,-1058.84) 6173.42,-1102.42 ; 6173.42,-1102.42 cw(c6129.84,-1146) 6191.47,-1146 ccw(c6129.84,-1146) 6173.42,-1102.42 ; 6187.08,-1116.08 ccw(c6217,-1086.16) 6217,-1128.47 cw(c6217,-1086.16) 6187.08,-1116.08 ; 6187.08,-1116.08 cw(c6157.16,-1146) 6199.47,-1146 ccw(c6157.16,-1146) 6187.08,-1116.08 ; 6282.59,-510.43 ccw(c6282.59,-503.46) 6287.52,-508.39 cw(c6282.59,-503.46) 6282.59,-510.43 ; 6282.59,-510.43 cw(c6282.59,-517.41) 6287.52,-512.48 ccw(c6282.59,-517.41) 6282.59,-510.43
  Bottom Layer w5: 6112,-2007 6112,-2038.18 6118.82,-2045 6118.82,-2077.07 6187,-2145.25 v2(6187,-2146) ; 6177.94,-2140.17 ccw(c6189.12,-2137.17) v2@6186.42,-2148.43 ; 6173.67,-2131.92 cw(c6159.59,-2146) 6179.5,-2146 ccw(c6159.59,-2146) 6173.67,-2131.92 ; 6175.47,-2133.73 ccw(c6187,-2122.2) 6187,-2138.5 cw(c6187,-2122.2) 6175.47,-2133.73
  Bottom Layer w8: 6112,-2007 6112,-1305.49 6155.53,-1261.96 6155.53,-1207.47 P23.26@6217,-1146 ; P23.26@6191.47,-1146 cw(c6129.84,-1146) 6173.42,-1189.58 cw(c6217,-1233.16) P23.26@6217,-1171.53 ; P23.26@6199.47,-1146 cw(c6157.16,-1146) 6187.08,-1175.92 cw(c6217,-1205.84) P23.26@6217,-1163.53
CELL25: MUX2.10 P23.27 RR1.27 | length 2058.7
  Top Layer w8: RR1.27@6059.33,-1962.73 ccw(c6049.35,-1952.76) 6063.46,-1952.76 ccw(c6077.56,-1952.76) RR1.27@6067.59,-1962.73 ; RR1.27@6063.46,-1966.87 6063.46,-1499.54 P23.27@6317,-1246 6255.53,-1184.53 6255.53,-1130.04 6185,-1059.51 6185,-588.38 6237.36,-536.02 MUX2.10@6313.19,-536.02 ; P23.27@6317,-1271.53 ccw(c6317,-1333.16) 6273.42,-1289.58 ccw(c6229.84,-1246) 6291.47,-1246 ccw(c6229.84,-1246) 6273.42,-1202.42 ccw(c6317,-1158.84) P23.27@6317,-1220.47 ; P23.27@6317,-1263.53 ccw(c6317,-1305.84) 6287.08,-1275.92 ccw(c6257.16,-1246) 6299.47,-1246 ccw(c6257.16,-1246) 6287.08,-1216.08 ccw(c6317,-1186.16) P23.27@6317,-1228.47 ; 6282.59,-536.02 ccw(c6282.59,-529.05) 6287.52,-533.98 cw(c6282.59,-529.05) 6282.59,-536.02 ; 6282.59,-536.02 cw(c6282.59,-543) 6287.52,-538.07 ccw(c6282.59,-543) 6282.59,-536.02
CELL26: MUX2.9 P23.28 RR1.28 | length 2499.1
  Top Layer w5: RR1.28@6089.05,-1998.05 RR1.28@6089.05,-1992.46 6120.23,-2023.64 6120.23,-2037.51 6137,-2054.28 6137,-2075.04 6164.96,-2103 6165.46,-2103 ; 6165.46,-2103.5 6184.96,-2123 v2(6206,-2123) ; 6187.89,-2123 ccw(c6187.89,-2104.89) 6200.7,-2117.7 cw(c6187.89,-2104.89) 6187.89,-2123 ; 6187.89,-2123 cw(c6187.89,-2141.11) 6200.7,-2128.3 ccw(c6187.89,-2141.11) 6187.89,-2123
  Top Layer w8: 6278.08,-1125 cw(c6278.08,-1146.39) P23.28@6299.47,-1146.18 ; 6286.16,-1125 cw(c6286.16,-1146.31) P23.28@6307.47,-1146.1 ; P23.28@6291.47,-1146.26 ccw(c6270,-1146.47) 6270,-1125 ; 6294.24,-1125 cw(c6294.24,-1146.23) P23.28@6315.47,-1146.02 ; MUX2.9@6313.19,-561.61 6230.16,-561.61 6198,-593.77 6198,-1053 6270,-1125 ; P23.28@6317,-1146 6296,-1125 ; 6270,-1125 6296,-1125 ; 6282.59,-561.61 ccw(c6282.59,-554.64) 6287.52,-559.57 cw(c6282.59,-554.64) 6282.59,-561.61 ; 6282.59,-561.61 cw(c6282.59,-568.59) 6287.52,-563.66 ccw(c6282.59,-568.59) 6282.59,-561.61 ; 6296,-1125 ccw(c6299.19,-1121.81) 6301.86,-1125.44 cw(c6299.19,-1121.81) 6296,-1125 ; 6296,-1125 cw(c6292.81,-1128.19) 6296.44,-1130.86 ccw(c6292.81,-1128.19) 6296,-1125
  Bottom Layer w5: 6137,-1965 6137,-1993.47 6128.82,-2001.65 6128.82,-2066.86 6184.96,-2123 v2(6206,-2123) ; 6187.89,-2123 ccw(c6187.89,-2104.89) 6200.7,-2117.7 cw(c6187.89,-2104.89) 6187.89,-2123 ; 6187.89,-2123 cw(c6187.89,-2141.11) 6200.7,-2128.3 ccw(c6187.89,-2141.11) 6187.89,-2123
  Bottom Layer w8: 6137,-1965 6137,-1781 6272,-1646 6272,-1191 P23.28@6317,-1146 ; P23.28@6291.47,-1146 cw(c6229.84,-1146) 6273.42,-1189.58 cw(c6317,-1233.16) P23.28@6317,-1171.53 ; P23.28@6299.47,-1146 cw(c6257.16,-1146) 6287.08,-1175.92 cw(c6317,-1205.84) P23.28@6317,-1163.53
CELL27: MUX2.8 P23.29 RR1.29 | length 2095
  Top Layer w8: RR1.29@6084.92,-1962.73 ccw(c6074.94,-1952.76) 6089.05,-1952.76 ccw(c6103.15,-1952.76) RR1.29@6093.18,-1962.73 ; RR1.29@6089.05,-1966.87 6089.05,-1573.95 P23.29@6417,-1246 6417,-1242 6355.53,-1180.53 6355.53,-1130.04 6332.96,-1107.47 6317.47,-1107.47 6211,-1001 6211,-610 6233.8,-587.2 MUX2.8@6313.19,-587.2 ; 6370.59,-1195.59 cw(c6320.19,-1246) 6391.47,-1246 cw(c6329.84,-1246) 6373.42,-1289.58 cw(c6417,-1333.16) P23.29@6417,-1271.53 ; 6380.25,-1205.25 ccw(c6417,-1168.5) P23.29@6417,-1220.47 ; 6384.25,-1209.25 cw(c6347.5,-1246) 6399.47,-1246 cw(c6357.16,-1246) 6387.08,-1275.92 cw(c6417,-1305.84) P23.29@6417,-1263.53 ; 6393.91,-1218.91 ccw(c6417,-1195.81) P23.29@6417,-1228.47 ; 6397.91,-1222.91 cw(c6374.81,-1246) P23.29@6407.47,-1246 ; 6282.59,-587.2 ccw(c6282.59,-580.23) 6287.52,-585.16 cw(c6282.59,-580.23) 6282.59,-587.2 ; 6282.59,-587.2 cw(c6282.59,-594.18) 6287.52,-589.25 ccw(c6282.59,-594.18) 6282.59,-587.2
CELL28: MUX2.7 P23.31 RR1.31 | length 2141
  Top Layer w8: RR1.31@6110.51,-1962.73 ccw(c6100.53,-1952.76) 6114.64,-1952.76 ccw(c6128.74,-1952.76) RR1.31@6118.77,-1962.73 ; RR1.31@6114.64,-1966.87 6114.64,-1648.36 P23.31@6517,-1246 6470,-1199 6470,-1140 6430,-1100 6345,-1100 6224,-979 6224,-631 6242.2,-612.8 MUX2.7@6313.19,-612.8 ; P23.31@6517,-1271.53 ccw(c6517,-1333.16) 6473.42,-1289.58 ccw(c6429.84,-1246) 6491.47,-1246 ccw(c6429.84,-1246) 6473.42,-1202.42 ccw(c6517,-1158.84) P23.31@6517,-1220.47 ; P23.31@6517,-1263.53 ccw(c6517,-1305.84) 6487.08,-1275.92 ccw(c6457.16,-1246) 6499.47,-1246 ccw(c6457.16,-1246) 6487.08,-1216.08 ccw(c6517,-1186.16) P23.31@6517,-1228.47 ; 6282.59,-612.8 ccw(c6282.59,-605.82) 6287.52,-610.75 cw(c6282.59,-605.82) 6282.59,-612.8 ; 6282.59,-612.8 cw(c6282.59,-619.77) 6287.52,-614.84 ccw(c6282.59,-619.77) 6282.59,-612.8
CELL29: MUX2.6 P23.32 RR1.32 | length 2457.6
  Top Layer w5: RR1.32@6140.23,-1992.46 6140.23,-2029.23 v2@6167,-2056 ; 6151.06,-2039.42 cw(c6144.28,-2064.73) v2@6167.76,-2053.11 ; 6158.77,-2046.49 ccw(c6161.32,-2036.96) v2@6166.25,-2045.5 ; 6161.74,-2042.29 cw(c6157.48,-2058.2) v2@6172.24,-2050.89 ; 6145.25,-2034.25 ccw(c6170,-2009.49) 6170,-2044.5 cw(c6170,-2009.49) 6145.25,-2034.25 ; 6153.78,-2042.78 ccw(c6170,-2026.57) 6170,-2049.5 cw(c6170,-2026.57) 6153.78,-2042.78
  Top Layer w8: MUX2.6@6313.19,-638.39 6258.61,-638.39 6240,-657 6240,-965 6350,-1075 6446,-1075 P23.32@6517,-1146 ; P23.32@6491.47,-1146 ccw(c6429.84,-1146) 6473.42,-1102.42 ccw(c6517,-1058.84) P23.32@6517,-1120.47 ; P23.32@6499.47,-1146 ccw(c6457.16,-1146) 6487.08,-1116.08 ccw(c6517,-1086.16) P23.32@6517,-1128.47 ; 6282.59,-638.39 ccw(c6282.59,-631.41) 6287.52,-636.34 cw(c6282.59,-631.41) 6282.59,-638.39 ; 6282.59,-638.39 cw(c6282.59,-645.36) 6287.52,-640.43 ccw(c6282.59,-645.36) 6282.59,-638.39
  Bottom Layer w5: 6148.82,-2032.57 6148.82,-2037.82 ; 6149.17,-2032.21 6148.82,-2031.86 6148.82,-2014.18 6172,-1991 6172,-1975 ; 6159.52,-2043.4 cw(c6157.22,-2061.96) v2@6171.97,-2050.46 ; v2@6167,-2056 6148.82,-2037.82 ; 6148.82,-2037.82 ccw(c6165.67,-2020.97) 6168.96,-2044.57 cw(c6165.67,-2020.97) 6148.82,-2037.82 ; 6155.92,-2044.92 ccw(c6167.41,-2033.43) 6169.65,-2049.52 cw(c6167.41,-2033.43) 6155.92,-2044.92
  Bottom Layer w8: 6172,-1975 6172,-1836 6467,-1541 6467,-1196 P23.32@6517,-1146 ; P23.32@6491.47,-1146 cw(c6429.84,-1146) 6473.42,-1189.58 cw(c6517,-1233.16) P23.32@6517,-1171.53 ; P23.32@6499.47,-1146 cw(c6457.16,-1146) 6487.08,-1175.92 cw(c6517,-1205.84) P23.32@6517,-1163.53
  other v2: 6170,-2052
CELL30: MUX2.5 P23.33 RR1.33 | length 2159.2
  Top Layer w8: RR1.33@6136.1,-1962.73 ccw(c6126.12,-1952.76) 6140.23,-1952.76 ccw(c6154.33,-1952.76) RR1.33@6144.36,-1962.73 ; RR1.33@6140.23,-1966.87 6140.23,-1722.77 P23.33@6617,-1246 6665,-1198 6665,-1150 6655.53,-1140.53 6655.53,-1130.04 6632.96,-1107.47 6607.47,-1107.47 6575,-1075 6575,-741.92 6533.08,-700 6435,-700 6398.98,-663.98 MUX2.5@6313.19,-663.98 ; P23.33@6591.47,-1246 cw(c6529.84,-1246) 6573.42,-1289.58 cw(c6617,-1333.16) P23.33@6617,-1271.53 ; P23.33@6599.47,-1246 cw(c6557.16,-1246) 6587.08,-1275.92 cw(c6617,-1305.84) P23.33@6617,-1263.53 ; P23.33@6617,-1228.47 ccw(c6617,-1186.16) 6646.92,-1216.08 ccw(c6676.84,-1246) P23.33@6634.53,-1246 ; P23.33@6617,-1220.47 ccw(c6617,-1158.84) 6660.58,-1202.42 ccw(c6704.16,-1246) P23.33@6642.53,-1246 ; 6343.79,-663.98 ccw(c6343.79,-670.95) 6338.85,-666.02 cw(c6343.79,-670.95) 6343.79,-663.98 ; 6343.79,-663.98 cw(c6343.79,-657) 6338.85,-661.93 ccw(c6343.79,-657) 6343.79,-663.98
CELL31: MUX2.4 P23.34 RR1.34 | length 2267
  Top Layer w5: RR1.34@6162.15,-1998.82 cw(c6157.58,-2006.73) 6166.4,-2004.36 ; RR1.34@6163.24,-1999.33 cw(c6159.65,-2008.89) 6169.51,-2006.25 cw(c6179.38,-2003.61) RR1.34@6171.49,-1997.12 ; 6167.46,-2008.29 cw(c6177.22,-2005.67) RR1.34@6170.62,-1998.02 ; v2@6167.73,-2015.66 ccw(c6165.34,-2013.24) 6167.97,-2011.08 ccw(c6173.09,-2006.87) v2@6173.05,-2013.5 ; v2@6168.22,-2015.22 ccw(c6163.56,-2009.61) 6169.2,-2004.97 ; v2@6171.41,-2019.07 ccw(c6166.76,-2013.47) 6172.38,-2008.85 ; v2(6173,-2021) 6165.82,-2013.82 ; 6165.82,-2013.82 ccw(c6168.03,-2011.61) 6169.49,-2014.37 cw(c6168.03,-2011.61) 6165.82,-2013.82 ; 6165.82,-2013.82 cw(c6163.61,-2016.03) 6166.37,-2017.49 ccw(c6163.61,-2016.03) 6165.82,-2013.82 ; 6165.82,-2013.82 RR1.34@6165.82,-1992.46 ; 6165.82,-2010.18 ccw(c6148.09,-2010.18) 6160.63,-1997.65 cw(c6148.09,-2010.18) 6165.82,-2010.18 ; 6165.82,-2010.18 cw(c6183.55,-2010.18) 6171.01,-1997.65 ccw(c6183.55,-2010.18) 6165.82,-2010.18 ; RR1.34@6165.82,-1992.46 ccw(c6193.4,-1992.46) 6177.36,-2014.9 cw(c6193.4,-1992.46) RR1.34@6165.82,-1992.46 ; 6165.82,-2011.9 ccw(c6179.51,-2011.9) 6171.55,-2023.03 cw(c6179.51,-2011.9) 6165.82,-2011.9 ; RR1.34@6165.82,-2002.18 ccw(c6186.45,-2002.18) 6174.45,-2018.97 cw(c6186.45,-2002.18) RR1.34@6165.82,-2002.18
  Top Layer w8: MUX2.4@6313.19,-689.57 6394.57,-689.57 6425,-720 6534.7,-720 6560,-745.3 6560,-1089 P23.34@6617,-1146 ; 6343.79,-689.57 ccw(c6343.79,-696.54) 6338.85,-691.61 cw(c6343.79,-696.54) 6343.79,-689.57 ; 6343.79,-689.57 cw(c6343.79,-682.59) 6338.85,-687.52 ccw(c6343.79,-682.59) 6343.79,-689.57
  Bottom Layer w5: v2(6173,-2021) 6192,-2002 6192,-1960 ; 6185.8,-2008.2 ccw(c6198.61,-2021) 6180.5,-2021 cw(c6198.61,-2021) 6185.8,-2008.2 ; 6185.8,-2008.2 cw(c6173,-1995.39) 6173,-2013.5 ccw(c6173,-1995.39) 6185.8,-2008.2
  Bottom Layer w8: 6192,-1960 6192,-1871 6577,-1486 6577,-1186 ; P23.34@6591.52,-1147.59 cw(c6541.71,-1150.71) 6577,-1186 ; P23.34@6599.51,-1147.09 cw(c6565.31,-1149.23) 6589.54,-1173.46 cw(c6613.77,-1197.69) P23.34@6615.91,-1163.49 ; P23.34@6615.41,-1171.48 ccw(c6612.29,-1221.29) 6577,-1186 ; P23.34@6617,-1146 6577,-1186
CELL32: MUX3.19 P23.35 RR1.35 | length 2431
  Top Layer w8: RR1.35@6161.69,-1962.73 ccw(c6151.71,-1952.76) 6165.82,-1952.76 ccw(c6179.92,-1952.76) RR1.35@6169.95,-1962.73 ; RR1.35@6165.82,-1966.87 6165.82,-1732.18 6610.47,-1287.53 6675.47,-1287.53 ; 6688.05,-1194.11 cw(c6654.29,-1227.87) P23.35@6700.16,-1241.13 ; P23.35@6691.49,-1246.89 cw(c6636.73,-1248.79) 6675.47,-1287.53 ; P23.35@6692.48,-1238.91 ccw(c6639.43,-1223.58) 6678.47,-1184.53 ; 6697.63,-1203.69 cw(c6669.15,-1232.17) P23.35@6707.85,-1243.35 ; P23.35@6699.48,-1246.61 cw(c6661.89,-1247.91) 6688.49,-1274.51 cw(c6715.09,-1301.11) P23.35@6716.39,-1263.52 ; 6707.21,-1213.27 cw(c6684.02,-1236.47) P23.35@6715.53,-1245.58 ; P23.35@6716.11,-1271.51 ccw(c6714.21,-1326.27) 6675.47,-1287.53 ; MUX3.19@6911.81,-536.02 6633.98,-536.02 6588,-582 6588,-1038 6678.47,-1128.47 6678.47,-1184.53 ; 6675.47,-1287.53 P23.35@6717,-1246 6717,-1223.06 6678.47,-1184.53 ; 6881.21,-536.02 ccw(c6881.21,-529.05) 6886.15,-533.98 cw(c6881.21,-529.05) 6881.21,-536.02 ; 6881.21,-536.02 cw(c6881.21,-543) 6886.15,-538.07 ccw(c6881.21,-543) 6881.21,-536.02
CELL33: MUX3.20 P23.36 RR1.36 | length 2576.1
  Top Layer w5: RR1.36@6191.41,-1992.46 6191.41,-2070.41 v2(6237,-2116) ; 6228.02,-2110.46 ccw(c6238.72,-2107.59) v2@6236.5,-2118.45 ; 6231.46,-2107.02 cw(c6228.59,-2117.72) v2@6239.45,-2115.5 ; 6191.41,-2010.18 ccw(c6173.68,-2010.18) 6186.22,-1997.65 cw(c6173.68,-2010.18) 6191.41,-2010.18 ; 6191.41,-2010.18 cw(c6209.14,-2010.18) 6196.6,-1997.65 ccw(c6209.14,-2010.18) 6191.41,-2010.18 ; 6224.2,-2103.2 ccw(c6237,-2090.39) 6237,-2108.5 cw(c6237,-2090.39) 6224.2,-2103.2 ; 6224.2,-2103.2 cw(c6211.39,-2116) 6229.5,-2116 ccw(c6211.39,-2116) 6224.2,-2103.2
  Top Layer w8: P23.36@6717,-1146 6601,-1030 6601,-587.38 6626.77,-561.61 MUX3.20@6911.81,-561.61 ; 6881.21,-561.61 ccw(c6881.21,-554.64) 6886.15,-559.57 cw(c6881.21,-554.64) 6881.21,-561.61 ; 6881.21,-561.61 cw(c6881.21,-568.59) 6886.15,-563.66 ccw(c6881.21,-568.59) 6881.21,-561.61
  Bottom Layer w5: 6207,-1991 6207,-2086 v2(6237,-2116) ; 6224.2,-2103.2 ccw(c6237,-2090.39) 6237,-2108.5 cw(c6237,-2090.39) 6224.2,-2103.2 ; 6224.2,-2103.2 cw(c6211.39,-2116) 6229.5,-2116 ccw(c6211.39,-2116) 6224.2,-2103.2
  Bottom Layer w8: 6207,-1991 6207,-1886 6678.47,-1414.53 6678.47,-1230.04 6717,-1191.51 ; P23.36@6703.69,-1167.78 cw(c6689.19,-1191.51) 6717,-1191.51 ; P23.36@6707.86,-1160.96 cw(c6697.91,-1177.25) 6717,-1177.25 cw(c6736.09,-1177.25) P23.36@6726.14,-1160.96 ; P23.36@6717,-1146 6717,-1191.51 ; P23.36@6730.31,-1167.78 ccw(c6744.81,-1191.51) 6717,-1191.51